# Altium PCB Control_PCB.PcbDoc
Units mm, origin at the board's own origin, x right, y up, seen from the top; angles counter-clockwise.
Board outline 110 x 107.95 mm, 2 copper layers (Top Layer, Bottom Layer); 75 components, 62 nets, 258 pads, 54 vias.
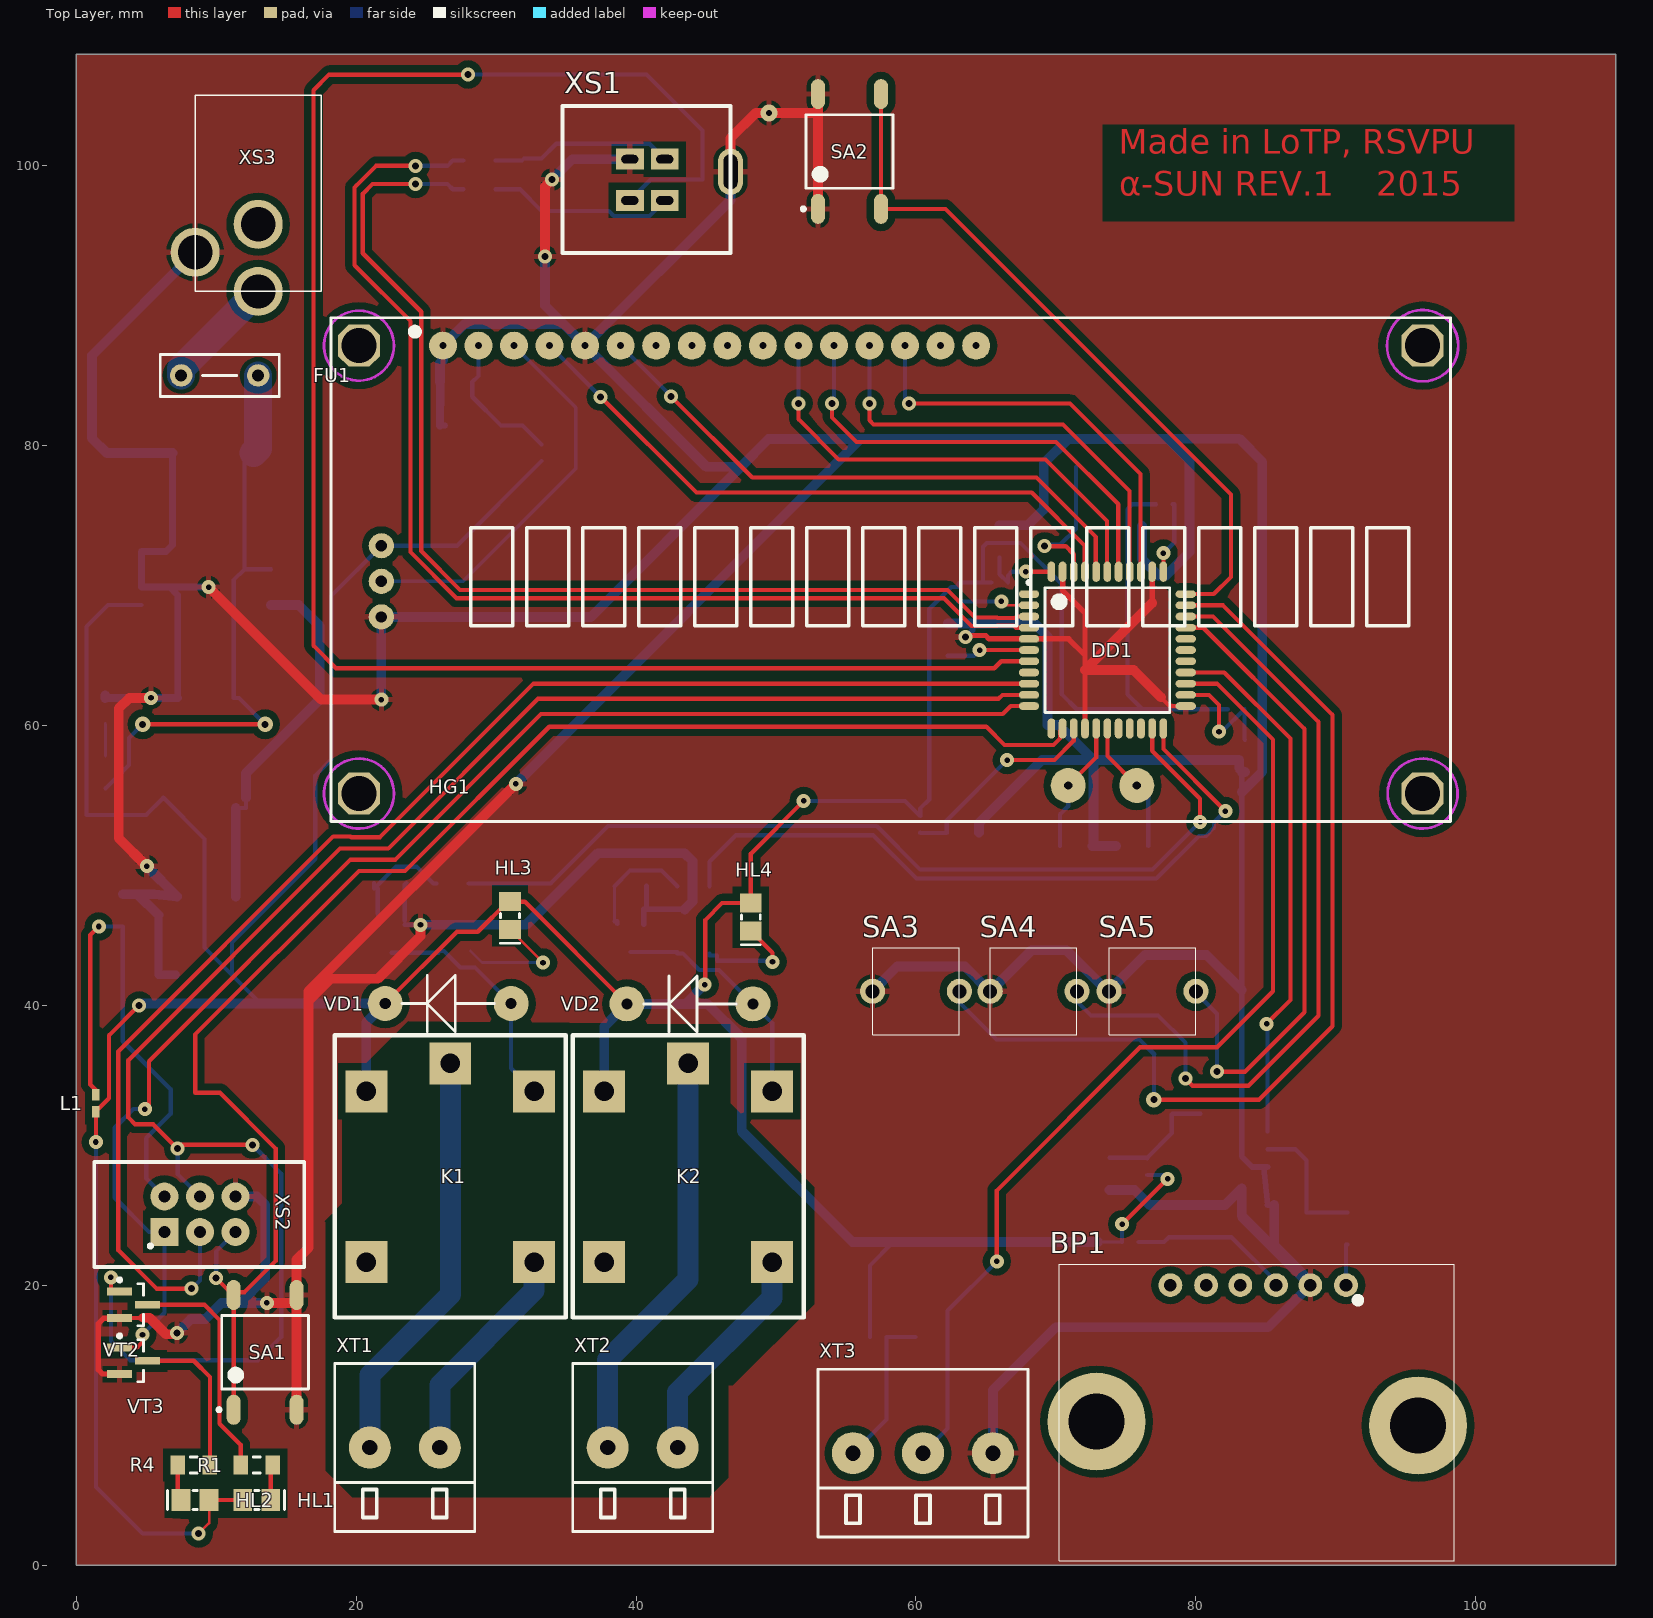
[diagram p0: Top Layer view]
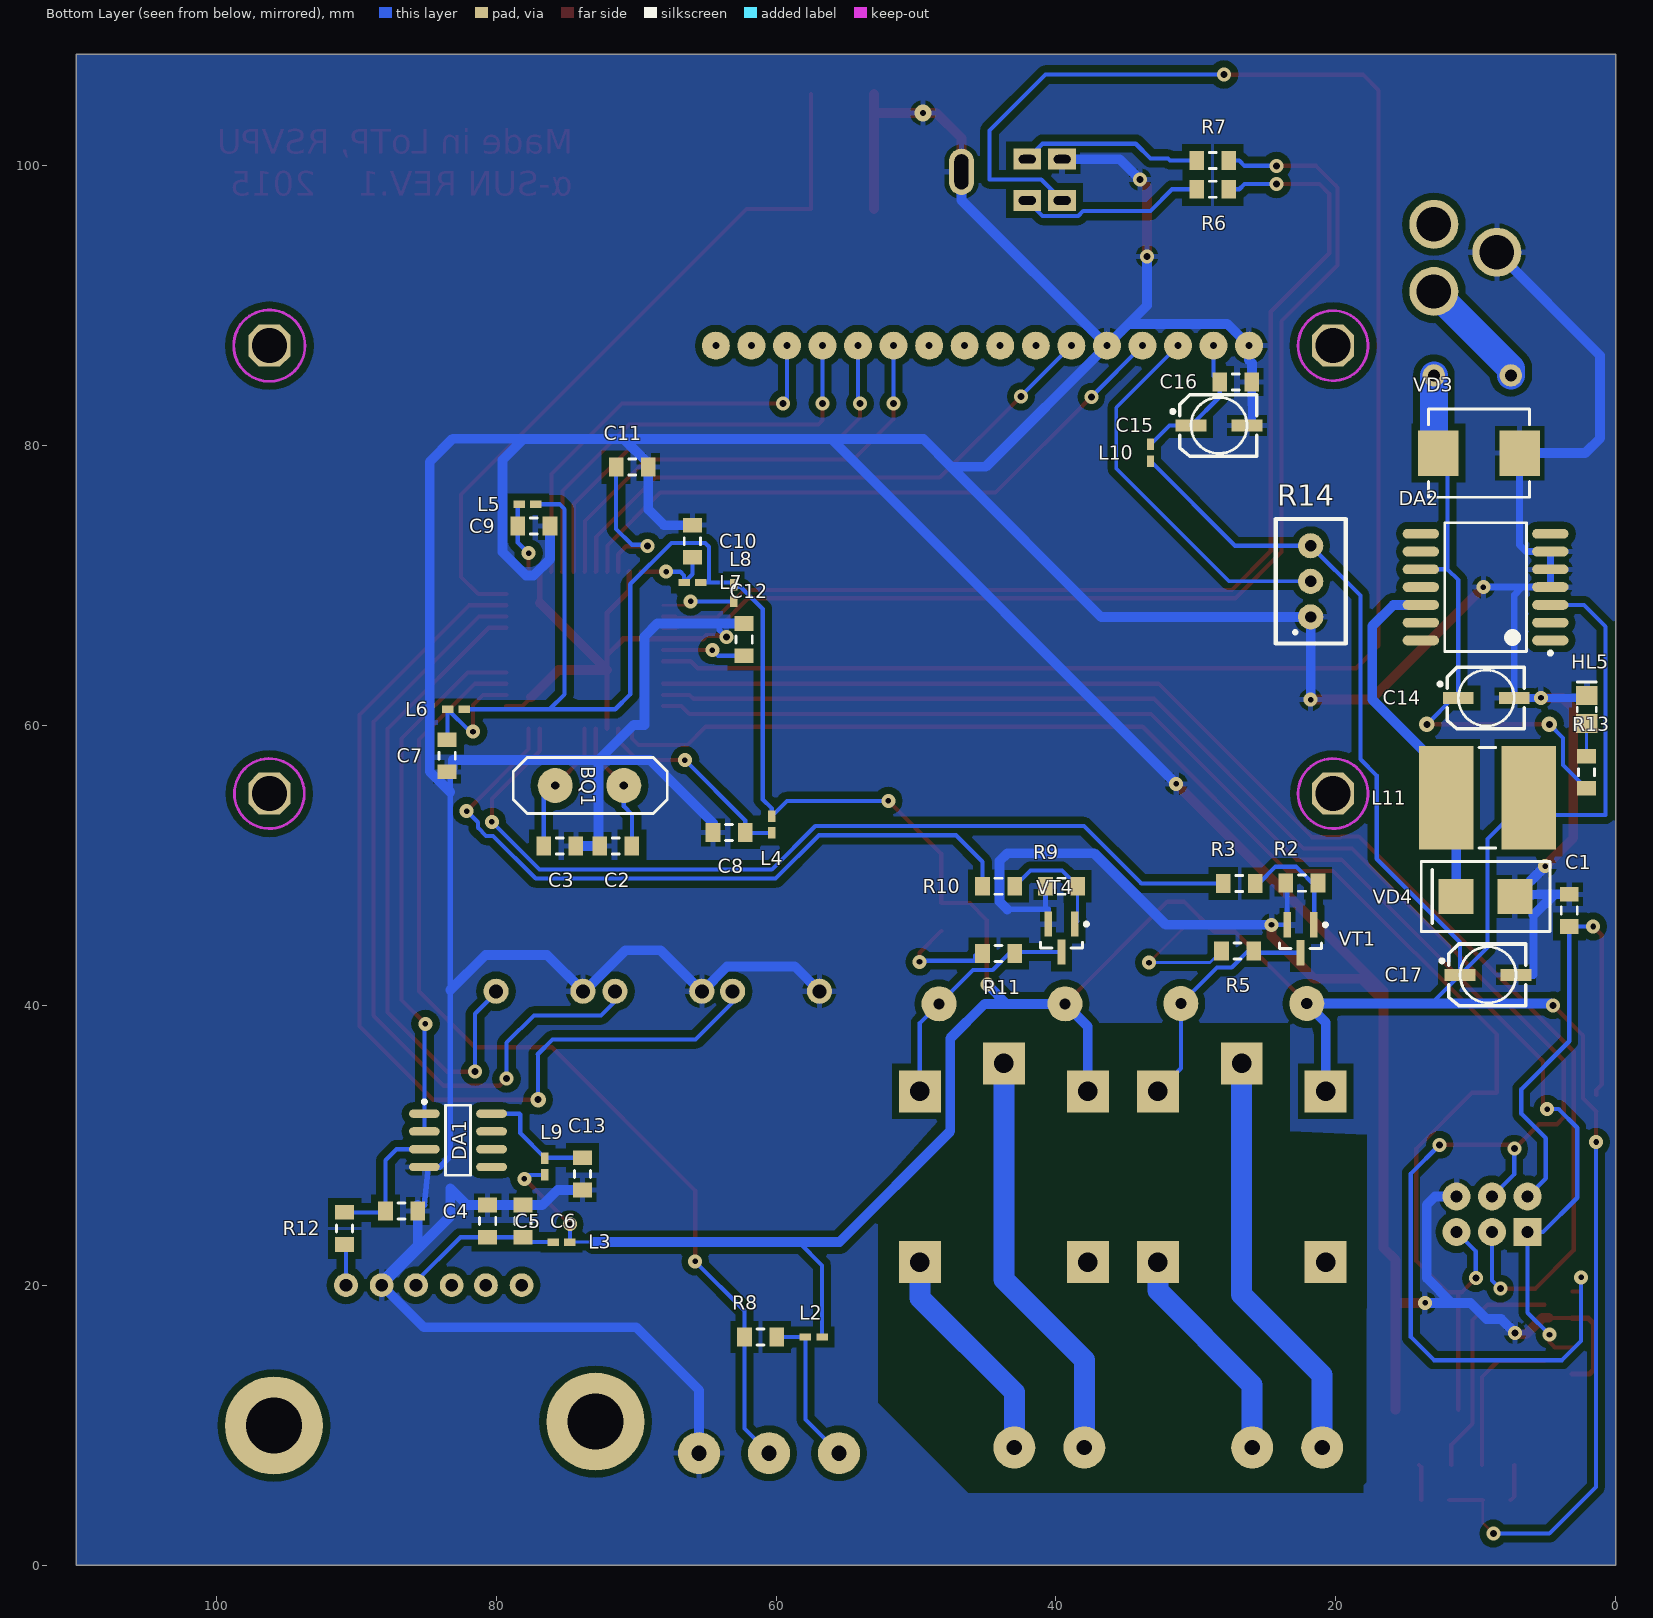
[diagram p1: Bottom Layer view, seen from below]

## Layer stack, top to bottom
Top Solder: solder mask 0.0102, Solder Resist, Dk 3.5
Top Layer: signal copper 0.0356
Dielectric 1: dielectric 0.32, FR-4, Dk 4.8
Bottom Layer: signal copper 0.0356
Bottom Solder: solder mask 0.0102, Solder Resist, Dk 3.5

## Board outline
0,0 110,0 110,107.95 0,107.95

## Design rules (kind name [scope] priority, off if disabled: settings)
Clearance Clearance_poly [InPolygon OR InPoly] p1: gap=0.5
Clearance Clearance_220V_1.5mm [InNet('220V_*')] p2: gap=1.5
Clearance Clearance_USB_0.1mm [InDifferentialPair ('D_USB')] p3: gap=0.2
Clearance Clearance_pad [IsPad] p4: gap=0.2
Clearance Clearance_all [All] p5: gap=0.35
DiffPairsRouting DiffPair_DiffPairsRouting [InDifferentialPair ('D_USB')] p1: maxlimit=1 minlimit=0.3 mostfreqgap=0.3 toplayer_minwidth=0.3 toplayer_maxwidth=0.3 toplayer_prefwidth=0.3 bottomlayer_minwidth=0.3 bottomlayer_maxwidth=0.3 bottomlayer_prefwidth=0.3 maxuncoupledlength=12.7
MatchedLengths DiffPair_MatchedLengths [InDifferentialPair ('D_USB')] p1: tolerance=25.4 checknetsindiffpair=TRUE checkdiffpairvsdiffpair=TRUE checkothers=TRUE
MaximumViaCount [All] p1: limit=10
MinimumSolderMaskSliver [All] p1: minsoldermaskwidth=0
PolygonConnect [All] p1: connectstyle=Relief reliefconductorwidth=0.4 reliefentries=4 polygonreliefangle="90 Angle" airgapwidth=0.3
RoutingPriority RoutingPriority_diffpair [(InDifferentialPairClass('All Differential Pairs'))] p1: routingpriority=0
RoutingPriority RoutingPriority_POWER [(InNet('+5V') OR InNet('GND'))] p2: routingpriority=100
RoutingPriority [All] p3: routingpriority=0
RoutingTopology RoutingTopology_GND [InNet('GND')] p1: topology=Starburst
RoutingTopology [All] p2: topology=Shortest
RoutingVias [All] p1: holewidth=0.4 width=1 viastyle="Through Hole" minholewidth=0.4 minwidth=1 maxholewidth=0.5 maxwidth=1.1
SMDNeckDown [All] p1: percent=70.000
SilkToSolderMaskClearance [IsPad] p1: minsilkscreentomaskgap=0.2 clearancetoexposedcopper=TRUE
SolderMaskExpansion [All] p1: expansion=0.102
ViasUnderSMD [All] p1: allowed=FALSE
Width Width_GND_0.7mm [InNet('GND')] p1: maxlimit=2 minlimit=0.3 preferedwidth=0.7
Width Width_+5V_0.7mm [InNet('+5V')] p2: maxlimit=2 minlimit=0.3 preferedwidth=0.7
Width [All] p3: maxlimit=2 minlimit=0.3 preferedwidth=0.3
24 further rules are at their usual default settings.

## Classes and differential pairs
net class LCD_[4..9]: LCD_4 LCD_5 LCD_6 LCD_7 LCD_8 LCD_9
component class Power_SCH: C7 C8 C9 C10 C11 C12 C13 C14 C15 C16 C17 DA1 DA2 FU1 HL5 L4 L5 L6 L7 L8 L9 L10 L11 R13 R14 VD3 VD4 XS3
component class Control_SCH: BP1 BQ1 C1 C2 C3 C4 C5 C6 DD1 HG1 HL1 HL2 HL3 HL4 K1 K2 L1 L2 L3 R1 R2 R3 R4 R5 R6 R7 R8 R9 R10 R11 R12 SA1 SA2 SA3 SA4 SA5 VD1 VD2 VT1 VT2 VT3 VT4 XS1 XS2 XT1 XT2 XT3
differential pair D_USB: +USB_P -USB_N

## Components (designator, comment, footprint, x,y, rotation, side; value= is the part's Value field where it differs from the comment)
BP1 "MPX5700AP" MPX5700AP 90.725,20 r180 top
BQ1 "16 МГц" HC-49/S 75.775,55.7 r180 bottom
C1 "100n" SMDRC0805 3.325,46.775 r90 bottom
C2 "20p" SMDRC0805 71.45,51.375 r0 bottom
C3 "20p" SMDRC0805 75.45,51.375 r180 bottom
C4 "330n" SMDRC0805 86.75,25.3 r180 bottom
C5 "1u" SMDRC0805 80.6,24.575 r270 bottom
C6 "10n" SMDRC0805 78.075,24.575 r270 bottom
C7 "100n" SMDRC0805 83.5,57.825 r270 bottom
C8 "100n" SMDRC0805 63.35,52.35 r0 bottom
C9 "100n" SMDRC0805 77.303,74.234 r180 bottom
C10 "100n" SMDRC0805 65.975,73.15 r90 bottom
C11 "100n" SMDRC0805 70.275,78.45 r0 bottom
C12 "1u" SMDRC0805 62.275,66.125 r90 bottom
C13 "100n" SMDRC0805 73.825,27.95 r270 bottom
C14 "CA050M2R20REB-0405" CAP_POLAR_ELLYTE_B 9.25,61.95 r180 bottom
C15 "CA016M0010REB-0405" CAP_POLAR_ELLYTE_B 28.35,81.425 r180 bottom
C16 "100n" SMDRC0805 27.15,84.525 r180 bottom
C17 "CA016M0010REB-0405" CAP_POLAR_ELLYTE_B 9.125,42.175 r180 bottom
DA1 "AD8542ARZ" AD8542ARZ 82.725,30.35 r180 bottom
DA2 "LM2574M-5.0" SOIC127P1030X264-14M 9.3,69.875 r0 bottom
DD1 "ATMega32U4-AU" 44ML_L 73.675,65.375 r0 top
FU1 "EFuse LP60-110F" "EFuse 1.1A" 7.5,85 r0 top
HG1 "WH1601A-YYK-CTK#" WH1601A 18.2,53.125 r0 top
HL1 "Orange" DIOMELF2012M 12.9,4.65 r0 top
HL2 "Orange" DIOMELF2012M 8.5,4.65 r180 top
HL3 "Red" DIOMELF2012M 31,46.4 r270 top
HL4 "Red" DIOMELF2012M 48.2,46.3 r270 top
HL5 "Green" DIOMELF2012M 2.075,61.125 r90 bottom
K1 "TRU-5VDC-SB-CL" TRU-5VDC-SB-CL 34.975,37.85 r90 top
K2 "TRU-5VDC-SB-CL" TRU-5VDC-SB-CL 51.975,37.85 r90 top
L1 "MPZ1608S181A" INDC0603X03M 1.4,33 r90 top
L2 "MPZ1608S181A" INDC0603X03M 57.3,16.3 r180 bottom
L3 "MPZ1608S181A" INDC0603X03M 75.325,23.075 r180 bottom
L4 "MPZ1608S181A" INDC0603X03M 60.3,52.925 r90 bottom
L5 "MPZ1608S181A" INDC0603X03M 77.75,75.8 r180 bottom
L6 "MPZ1608S181A" INDC0603X03M 82.875,61.15 r180 bottom
L7 "MPZ1608S181A" INDC0603X03M 65.975,70.2 r180 bottom
L8 "MPZ1608S181A" INDC0603X03M 63.025,69.45 r90 bottom
L9 "MPZ1608S181A" INDC0603X03M 76.525,28.475 r90 bottom
L10 "MPZ1608S181A" INDC0603X03M 33.25,79.475 r270 bottom
L11 "SCD0705T-331K-N" INDP7972X50M 9.175,54.825 r0 bottom
R1 "220" SMDRC0805 12.9,7.15 r0 top
R2 "10k" SMDRC0805 22.425,48.725 r0 bottom
R3 "200" SMDRC0805 26.9,48.7 r180 bottom
R4 "220" SMDRC0805 8.4,7.15 r180 top
R5 "220" SMDRC0805 27.025,43.875 r0 bottom
R6 "22" SMDRC0805 28.8,98.3 r0 bottom
R7 "22" SMDRC0805 28.8,100.35 r0 bottom
R8 "4,7k" SMDRC0805 61.1,16.3 r0 bottom
R9 "10k" SMDRC0805 39.6,48.5 r0 bottom
R10 "200" SMDRC0805 44.1,48.5 r180 bottom
R11 "220" SMDRC0805 44.1,43.7 r0 bottom
R12 "750" SMDRC0805 90.825,24.05 r90 bottom
R13 "750" SMDRC0805 2.1,56.65 r270 bottom
R14 "T93YA102KT20" T93YA 21.8,67.75 r90 bottom
SA1 "DTSM20-4.3" DTSM20 13.5,15.2 r90 top
SA2 "DTSM20-4.3" DTSM20 55.25,101 r90 top
SA3 "SWT14-13" SWT14 56.9,37.9 r0 top
SA4 "SWT14-13" SWT14 65.3,37.9 r0 top
SA5 "SWT14-13" SWT14 73.8,37.9 r0 top
VD1 "1N4001" PinDiode 31.075,40.125 r180 top
VD2 "1N4001" PinDiode 48.35,40.1 r180 top
VD3 "SM15T12CA" SUPRES3216X18N 9.775,79.45 r0 bottom
VD4 "10BQ060TRPBF" "SHOTKY 4.1x3.3" 9.3,47.775 r0 bottom
VT1 "2N7002" "SOT23 (TO-236AB)" 22.525,44.75 r270 bottom
VT2 "2N7002" "SOT23 (TO-236AB)" 4.1,18.6 r0 top
VT3 "2N7002" "SOT23 (TO-236AB)" 4.1,14.6 r0 top
VT4 "2N7002" "SOT23 (TO-236AB)" 39.6,44.8 r270 bottom
XS1 "USB B A-09 РОЗЕТКА НА ПЛАТУ" USB2.0B_Vertical 46.75,104.25 r180 top
XS2 "IDC-06M" IDC-06M 6.3,23.8 r90 top
XS3 "330-031-12" 330-031-12 17.5,105 r180 top
XT1 "305-021-12" 305-021-12 20.975,8.4 r0 top
XT2 "305-021-12" 305-021-12 37.975,8.4 r0 top
XT3 "305-031-12" 305-031-12 55.5,8 r0 top

## Footprints (in the part's own frame and the unit in brackets; to place one, negate y for a bottom-side part, rotate by r counter-clockwise, add the part's x,y. Pads: shape width x height; smd on the part's side, far side on the other; paste and mask are expansions set on the pad)
44ML_L [mm] "Thin QFP, 44-Leads, Body 10x10mm, Pitch 0.8mm, IPC High Density"
  oval 1.45x0.55 smd: 1(-5.6,4) 2(-5.6,3.2) 3(-5.6,2.4) 4(-5.6,1.6) 5(-5.6,0.8) 6(-5.6,0) 7(-5.6,-0.8) 8(-5.6,-1.6) 9(-5.6,-2.4) 10(-5.6,-3.2) 11(-5.6,-4) 23(5.6,-4) 24(5.6,-3.2) 25(5.6,-2.4) 26(5.6,-1.6) 27(5.6,-0.8) 28(5.6,0) 29(5.6,0.8) 30(5.6,1.6) 31(5.6,2.4) 32(5.6,3.2) 33(5.6,4)
  oval 0.55x1.45 smd: 12(-4,-5.6) 13(-3.2,-5.6) 14(-2.4,-5.6) 15(-1.6,-5.6) 16(-0.8,-5.6) 17(0,-5.6) 18(0.8,-5.6) 19(1.6,-5.6) 20(2.4,-5.6) 21(3.2,-5.6) 22(4,-5.6) 34(4,5.6) 35(3.2,5.6) 36(2.4,5.6) 37(1.6,5.6) 38(0.8,5.6) 39(0,5.6) 40(-0.8,5.6) 41(-1.6,5.6) 42(-2.4,5.6) 43(-3.2,5.6) 44(-4,5.6)
  silkscreen extent -5.72,-4.45 4.45,4.95, body extent -5,-5 5,5, height 1.2
305-021-12 [mm]
  round 3 hole 1.1: 1(0,0) 2(5,0)
  silkscreen extent -2.5,-6 7.5,6, body extent -2.5,-6.5 7.5,6, height 12.5
305-031-12 [mm]
  round 3 hole 1.1: 1(0,0) 2(5,0) 3(10,0)
  silkscreen extent -2.5,-6 12.5,6, body extent -2.5,-6.5 12.5,6, height 12.5
330-031-12 [mm] "Power_Con"
  round 3.5 hole 2.45: 1(4.5,14) 2(9,11.2) 3(4.5,9.2)
  silkscreen extent 0,0 9,14, body extent -0.5,-0.1 9.48,14, height 10.96
AD8542ARZ [mm] "SOIC, 8-Leads, Body 4,90x3,90mm"
  oval 2.2x0.6 smd: 1(-2.4,1.905) 2(-2.4,0.635) 3(-2.4,-0.635) 4(-2.4,-1.905) 5(2.4,-1.905) 6(2.4,-0.635) 7(2.4,0.635) 8(2.4,1.905)
  silkscreen extent -2.53,-2.5 0.9,2.88, body extent -2,-2.5 2,2.5, height 1.75
CAP_POLAR_ELLYTE_B [mm] "Surface Mount Aluminum Electrolytic (size code B)"
  rect 2.2x0.85 smd: 1(2,0) 2(-2,0)
  silkscreen extent -3.43,-2.2 2.7,2.2, body extent -2.7,-2.2 2.8,2.2, height 5.5
DIOMELF2012M [mm] "MELF Diode, 2-Leads, Body 2,00x1,20mm, IPC Low Density"
  rect 1.35x1.55 smd: 1(-1,0) 2(1,0)
  silkscreen extent -0.15,-0.68 1.98,0.67, body extent -1,-0.6 1,0.6, height 1.2
DTSM20 [mm] "DTSM20 button footprint"
  oval 2.15x1 smd: 1(-4.1,2.25) 1(4.1,2.25) 2(-4.1,-2.25) 2(4.1,-2.25)
  silkscreen extent -4.22,-3.1 2.62,3.42, body extent -3.1,-3.1 3.1,3.1, height 5.5
"EFuse 1.1A" [mm]
  round 1.6 hole 0.85: 1(0,0) 2(5.5,0)
  silkscreen extent -1.5,-1.5 7,1.5, body extent -3.23,-0.5 8.73,0.5, height 12.99
HC-49/S [mm]
  round 2.5 hole 0.6: 1(0,0) 2(4.9,0)
  silkscreen extent -3,-2 8,2, body extent -3.5,-2.5 8.5,2.5, height 3.5
IDC-06M [mm]
  rect 2x2 hole 0.85: 1(0,0)
  round 2 hole 0.85: 2(2.54,0) 3(0,-2.54) 4(2.54,-2.54) 5(0,-5.08) 6(2.54,-5.08)
  silkscreen extent -2.5,-10 5,5, body extent -2.5,-10 5,5, height 8.4
INDC0603X03M [mm] "Chip Inductor, 2-Leads, Body 0,60x0,30mm, IPC Low Density"
  rect 0.82x0.52 smd: 1(-0.595,0) 2(0.595,0)
  body extent -0.3,-0.15 0.3,0.15, height 0.3
INDP7972X50M [mm] "Precision Wire Wound Inductor, 2-Leads, Body 7,90x7,20mm, IPC Low Density"
  rect 3.9x7.4 smd: 1(-2.95,0) 2(2.95,0)
  silkscreen extent -0.6,-3.6 0.6,3.6, body extent -3.95,-3.6 3.95,3.6, height 5
MPX5700AP [mm]
  round 7 hole 4: 0(-5.15,10.025) 0(17.825,9.75)
  round 1.7 hole 0.9: 1(0,0) 2(2.55,0) 3(5,0) 4(7.55,0) 5(10,0) 6(12.55,0)
  silkscreen extent -7.75,-1.5 20.5,19.68, body extent -2.48,-0.04 14.48,27, height 8
PinDiode [mm] "Simple pin diode with A and K designators"
  round 2.5 hole 0.8: A(0,0) K(9,0)
  silkscreen extent 1.2,-2 7.8,2, body extent -0.4,-1.4 9.4,1.4, height 2.79
"SHOTKY 4.1x3.3" [mm]
  rect 2.5x2.5 smd: A(-2.1,0) K(2.1,0)
  silkscreen extent -4.6,-2.5 4.6,2.5
SMDRC0805 [mm] "Chip Resistor, 2-Leads, Body 2,00x1,20mm, IPC Low Density"
  rect 1.05x1.35 smd: 1(-1.15,0) 2(1.15,0)
  silkscreen extent -0.25,-0.57 0.25,0.57, body extent -1,-0.6 1,0.6, height 0.4
SOIC127P1030X264-14M [mm] "SOIC, 14-Leads, Body 8,99x7,49mm, Pitch 1,27mm, IPC Low Density"
  oval 2.6x0.7 smd: 1(-4.625,3.81) 2(-4.625,2.54) 3(-4.625,1.27) 4(-4.625,0) 5(-4.625,-1.27) 6(-4.625,-2.54) 7(-4.625,-3.81) 8(4.625,-3.81) 9(4.625,-2.54) 10(4.625,-1.27) 11(4.625,0) 12(4.625,1.27) 13(4.625,2.54) 14(4.625,3.81)
  silkscreen extent -4.75,-4.6 2.93,4.83, body extent -3.8,-4.6 3.8,4.6, height 2.65
"SOT23 (TO-236AB)" [mm] "SOT23, 3-Leads, Body 2,90x2,45mm, Pitch 0,95mm, IPC Low Density"
  rect 1.8x0.55 smd: 1(-1,0.95) 2(-1,-0.95) 3(1,0)
  silkscreen extent -1.12,-1.5 0.7,1.9, body extent -0.7,-1.5 0.7,1.5, height 1.1
SUPRES3216X18N [mm]
  rect 2.9x3.25 smd: 1(-2.9,0) 2(2.9,0)
  silkscreen extent -3.6,-3.15 3.6,3.15, body extent -3.57,-3.13 3.57,3.13, height 2.65
SWT14 [mm]
  round 1.8 hole 1: 1(0,3.1) 2(6.2,3.1)
  silkscreen extent 0,0 6.2,6.2, body extent 0,0 6.2,6.2, height 16.5
T93YA [mm] "3/8\" Square Multi-Turn Cermet Trimmer"
  round 1.8 hole 0.8: 1(0,0) 2(2.54,0) 3(5.08,0)
  silkscreen extent -1.9,-2.5 7,2.5, body extent -1.9,-2.4 7,2.4, height 11.2
TRU-5VDC-SB-CL [mm]
  rect 3x3 hole 1.4: 1(-4,14.25) 2(-4,2.25) 3(-2,8.25) 4(-16.2,14.25) 5(-16.2,2.25)
  silkscreen extent -20.15,0 0,16.5, body extent -20.23,-0.01 0.15,16.62, height 21.2
USB2.0B_Vertical [mm] "Connector; USB1.1, Type B, Thru-Hole; 4 Position; Right Angle"
  rect 2x1.5 hole 0.6 slot 1.2 at 0 deg: D+(4.7,3.8) D-(4.7,6.75) GND(7.2,3.8) VCC(7.2,6.75)
  oval 1.8x3.3 hole 1 slot 2.5 at 90 deg: SHLD(0,4.7)
  silkscreen extent 0,0 12,10.5, body extent 0,0 12,10.5, height 16
WH1601A [mm]
  oct 3x3 hole 2.5: 0(2,2) 0(2,34) 0(78,2) 0(78,34)
  round 2 hole 0.5: 1(8,34) 2(10.54,34) 3(13.08,34) 4(15.62,34) 5(18.16,34) 6(20.7,34) 7(23.24,34) 8(25.78,34) 9(28.32,34) 10(30.86,34) 11(33.4,34) 12(35.94,34) 13(38.48,34) 14(41.02,34) 15(43.56,34) 16(46.1,34)
  Keep-Out Layer circle w0.2: c78,2 r2.5
  Keep-Out Layer circle w0.2: c78,34 r2.55
  Keep-Out Layer circle w0.2: c2,34 r2.5
  Keep-Out Layer circle w0.2: c2,2 r2.5
  silkscreen extent 0,0 80,36, body extent 0,0 80,36, height 12

## Part data
BP1: "Pressure sensor, 700kPa"
BQ1: library part Piezoelectric_16000, "Piezoelectric elements"
C1 C7 C8 C9 C10 C11 C13 C16: library part "Capacitor 0805 100n", "Generic capasitor non-polar"
C2 C3: library part "Capacitor 0805 20p", "Generic capasitor non-polar"
C4: library part "Capacitor 0805 330n", "Generic capasitor non-polar"
C5 C12: library part "Capacitor 0805 1u", "Generic capasitor non-polar"
C6: library part "Capacitor 0805 10n", "Generic capasitor non-polar"
C14: library part 02200_050, "2,2uF 50V Polar capacitor"
C15 C17: library part 10000_016, "10uF 16V Polar SMD cap"
DD1: library part ATMega32U4
FU1: "Fuse"
HG1: library part "LCD 1601A", "Liquid crystal display"
HL1 HL2: library part LED1_O, "Diod LED SMD Orange"
HL3 HL4: library part LED1_R, "Diod LED SMD Red"
HL5: library part LED1_G, "Diod LED SMD Green"
L1 L2 L3 L4 L5 L6 L7 L8 L9 L10: library part "Ferrite Bead", "Ferrite Bead"
L11: "Inductor"
R1 R4 R5 R11: library part "Resistor 0805 220", "Generic resistor"
R2 R9: library part "Resistor 0805 10k", "Generic resistor"
R3 R10: library part "Resistor 0805 200", "Generic resistor"
R6 R7: library part "Resistor 0805 22", "Generic resistor"
R8: library part "Resistor 0805 4,7k", "Generic resistor"
R12 R13: library part "Resistor 0805 750", "Generic resistor"
R14: library part "Res trim_1k", "Resistor trimming"
SA1 SA2: library part Switch1_DTSM20-4.3, "Switch open"
SA3 SA4 SA5: library part SWT-14-13
VD1 VD2: "Rectifying diode"
VD3: "Diod suppressor"
VD4: "DIODE SCHOTTKY 60V 1A DO214AA"
VT1 VT2 VT3 VT4: library part "2N7002 n-MOSFET", "60V, 300mA N-channel Trench MOSFET"
XS1: library part USB2.0-BR, "USB-B Vertical"
XS2: library part "Con6_M IDC-06M_SPI", "SPI connector"
XT1 XT2: library part "Con2_D 305-021-12", "Demountable connection  2-pin"
XT3: library part "Con3_D 305-031-12", "Demountable connection 3-pin"

## Via types
v1: diameter 1, hole 0.4, Top Layer to Bottom Layer, 28 vias
v2: diameter 1, hole 0.5, Top Layer to Bottom Layer, 22 vias
v3: diameter 1.1, hole 0.5, Top Layer to Bottom Layer, 3 vias
v4: diameter 1.2, hole 0.4, Top Layer to Bottom Layer, 1 vias

## Nets (pads, with @x,y where several pads share a name; then routed paths per layer and width w, separated by ;. In a path a pad name is that pad's centre, name@x,y a point inside that pad or via, vN(x,y) a via of type N, cw(c..) or ccw(c..) an arc to the next point about the centre after c; other vN are vias at no path point)
220V_N.C1: K1.4
220V_N.C2: K2.4
220V_N.O1: K1.3 XT1.1 | length 29.8
  Bottom Layer w1.5: XT1.1 20.975,13.6 26.725,19.35 K1.3
220V_N.O2: K2.3 XT2.1 | length 29.8
  Bottom Layer w1.5: XT2.1 37.975,14.65 43.725,20.4 K2.3
220V_ZERO1: K1.5 XT1.2 | length 16
  Bottom Layer w1.5: XT1.2 25.975,12.875 32.725,19.625 K1.5
220V_ZERO2: K2.5 XT2.2 | length 16
  Bottom Layer w1.5: XT2.2 42.975,12.35 49.725,19.1 K2.5
+5V: C17.2 DA2.3 HL1.1 HL2.1 HL3.1 HL4.1 K1.1 K2.1 L1.1 L2.2 L3.2 L4.2 L5.2 L6.2 L7.2 L8.2 L9.1 L10.2 L11.1 R14.3 VD1.K VD2.K | length 350.9
  Top Layer w0.2: v2(8.75,2.25) 9.5,3 HL2.1
  Top Layer w0.3: v1(1.41,30.227) 1.41,32.395 L1.1 2.35,33.355 2.35,37.85 v2(4.5,40) ; HL2.1 HL1.1 ; VD1.K 27.2,45.25 28.693,45.25 30.843,47.4 HL3.1 32.05,47.4 VD2.K ; v1@44.95,41.675 44.95,46.1 46.15,47.3 HL4.1 48.2,50.825 v1(51.975,54.6) ; v1(74.73,24.355) v1(77.975,27.6)
  Bottom Layer w0.2: 73,23.075 L3.2
  Bottom Layer w0.21: L8.2 63.025,70.2 L8.2@63.18,70.2
  Bottom Layer w0.3: v1(1.41,30.227) 1.41,5.59 4.75,2.25 v2(8.75,2.25) ; DA2.3 2.28,68.605 0.725,67.05 0.725,53.6 5,53.6 L11.1 9.175,51.875 9.175,44.125 C17.2 ; 13.175,40.125 C17.2 ; L10.2 27.2,72.83 R14.3 18.25,69.28 18.25,57.58 17.085,56.415 17.085,50.465 11.125,44.505 C17.2 ; v1(51.975,54.6) 59.22,54.6 L4.2 60.3,54.063 60.947,54.71 60.947,68.312 62.522,69.887 63.025,69.887 L8.2 ; L2.2 56.705,21.405 58.375,23.075 ; L8.2@63.18,70.2 64.783,70.2 ; L7.2 64.783,70.2 ; L3.2 v1(74.73,24.355) ; L9.1 77.695,27.88 v1(77.975,27.6) ; L5.2 75.476,75.8 75.12,75.444 75.12,62.216 76.186,61.15 ; L6.2 76.186,61.15 ; 64.783,70.2 64.783,72.757 65.062,73.036 67.464,73.036 70.421,70.079 70.421,62.216 71.487,61.15 76.186,61.15
  Bottom Layer w0.7: v2(4.5,40) 4.625,40.125 13.175,40.125 VD1.K 20.725,38.775 K1.1 ; K2.1 37.725,38.475 VD2.K 43.525,40.1 ; v1(44.9,41.475) 43.525,40.1 ; 73,23.075 58.375,23.075 55.475,23.075 47.55,31 47.55,37.641 45.091,40.1 43.525,40.1
GND: BP1.2 C1.2 C2.2 C3.2 C4.2 C5.1 C6.1 C7.2 C8.2 C9.2 C10.2 C11.1 C12.2 C13.2 C14.1 C15.1 C16.2 C17.1 DA1.4 DA2.4 DA2.5 DA2.6 DD1.5 DD1.15 DD1.23 DD1.35 DD1.43 HG1.1 HG1.5 HL5.2 R2.2 R9.2 R14.1 SA1.2 SA2.1 SA3.1 SA4.1 SA5.1 VD3.1 VD4.A VT1.2 VT2.2 VT3.2 VT4.2 XS1.GND XS1.SHLD XS2.6 XS3.2 XT3.3 | length 694.4
  Top Layer w0.3: VT2.2 4.8,17.65 ; 77.5,62 78.125,61.375 DD1.23
  Top Layer w0.385: VT3.2 1.893,13.65 1.587,13.956 1.587,17.258 1.979,17.65 VT2.2 ; v2(63.553,66.303) 63.667,66.417 64.986,66.417 65.228,66.175 DD1.5 69.224,66.175 69.227,66.178 69.405,66.178 70.904,66.178 72.075,65.007 ; DD1.43 70.475,69.633 72.075,68.033 72.075,65.007 ; DD1.15 72.075,63.944 72.075,65.007 ; 76.875,68.744 DD1.35
  Top Layer w0.7: 4.8,17.671 5.234,17.671 6.4,16.505 6.4,16.5 7.1,16.5 v2(7.2,16.6) ; v1(5.042,49.933) 3.035,51.94 3.035,61.2 3.797,61.962 v1(5.347,61.962) ; v1(9.461,69.875) 17.501,61.835 v1(21.8,61.835) ; v1(13.627,18.731) SA1.2@15.75,18.731 ; SA1.2@15.75,11.1 SA1.2@15.75,18.731 ; v1(24.6,45.75) 24.6,44.944 21.552,41.896 18.174,41.896 16.6,40.322 16.6,23.148 16.599,23.147 ; v1(31.407,55.815) 16.599,41.007 16.599,23.147 ; v2(33.5,93.5) 33.5,98.5 v2(34,99) ; XS1.SHLD 46.75,101.948 48.552,103.75 v4(49.5,103.75) 53,103.75 ; SA2.1@53,96.9 53,103.75 ; SA2.1@53,105.1 53,103.75 ; 76.875,68.744 72.075,63.944 75.556,63.944 77.5,62 ; SA1.2@15.75,18.731 15.75,19.3 15.75,21.819 16.599,22.668 16.599,23.147
  Bottom Layer w0.3: VT1.2 v1(24.6,45.75) ; VT1.2@23.475,46.036 23.475,48.625 R2.2
  Bottom Layer w0.385: VT4.2 40.55,46.849 40.75,46.849 ; R9.2 40.75,46.849 ; 43.472,46.849 40.75,46.849 ; v2(63.553,66.303) 64.05,66.8 64.05,67.275
  Bottom Layer w0.416: C15.1@25.997,81.425 C15.1
  Bottom Layer w0.42: C7.2@83.274,56.675 83.274,55.231 83.274,41.083 83.274,29.196 84.025,28.445 DA1.4 ; DA1.4@84.852,28.417 85.128,25.725 C4.2@85.6,25.725
  Bottom Layer w0.49: DA2.5 DA2.5@4.661,71.145 ; VD3.1 6.875,72.884 6.406,72.415 DA2.6 4.661,72.415 DA2.5@4.661,71.145 ; C14.1@7.252,61.95 7.252,69.328 6.705,69.875 ; v1(9.461,69.875) 6.705,69.875 ; 69.405,66.178 69.405,66.356 ; DA2.5@4.661,71.145 4.661,69.875 DA2.4 6.705,69.875
  Bottom Layer w0.595: HL5.2@2.075,61.95 v1@5.359,61.95 ; v1(5.347,61.962) v1@5.359,61.95 ; 5.88,46.443 5.88,42.175 C17.1 ; C14.1@7.252,61.95 C14.1 v1@5.359,61.95 ; C15.1@25.997,81.425 25.997,82.892 26,82.895 C16.2
  Bottom Layer w0.7: HL5.2@2.075,61.95 HL5.2 ; C1.2 4.398,47.925 ; v1(5.042,49.933) VD4.A 5.578,47.925 4.398,47.925 ; 5.88,46.443 4.398,47.925 ; VD3.1 2.184,79.45 1.13,80.504 1.13,86.43 XS3.2 ; v2(7.2,16.6) 8.188,17.588 9.233,17.588 10.376,18.731 11.731,18.731 ; XS2.6 12.91,26.34 13.5,25.75 13.5,20.5 11.731,18.731 ; v1(13.627,18.731) 11.731,18.731 ; v1(21.8,61.835) R14.1 36.766,67.75 47.488,78.472 ; v1(24.6,45.75) 32.152,45.75 37.264,50.862 43.472,50.862 44.031,50.303 44.031,47.408 43.472,46.849 ; C16.2 26,85.889 26.2,86.089 HG1.1 27.758,88.683 34.802,88.683 ; v1(31.407,55.815) 56.045,80.453 ; v2(33.5,93.5) 33.5,89.985 34.802,88.683 ; v2(34,99) 35.45,100.45 XS1.GND ; XS1.SHLD 46.75,97.515 HG1.5 ; SA3.1@56.862,40.964 58.658,42.76 63.501,42.76 65.297,40.964 68.261,43.928 70.768,43.928 73.732,40.964 76.368,43.6 80.757,43.6 83.274,41.083 ; C12.2 64.05,67.275 68.487,67.275 69.405,66.356 ; C8.2 64.5,53.021 68.996,57.517 72.682,57.517 ; XT3.3 65.5,12.5 70,17 85.175,17 BP1.2 ; C10.2 68.002,74.3 69.126,75.424 69.126,78.701 70.879,80.453 ; 69.405,66.178 69.405,60.032 70.167,60.032 72.682,57.517 ; C13.2 75.62,26.8 76.695,25.725 C6.1 C5.1 82.08,25.725 83.274,26.919 83.274,24.926 BP1.2@88.062,20.137 ; C3.2 74.3,51.37 72.6,51.37 C2.2 72.682,51.375 72.682,57.517 ; C9.2 76.153,71.868 77.321,70.7 77.864,70.7 79.54,72.376 79.54,78.955 78.041,80.453 ; 83.274,55.231 84.747,56.704 84.747,78.828 83.096,80.479 78.016,80.479 78.041,80.453 ; C7.2@83.274,56.675 C7.2@83.35,56.675 ; C7.2 C7.2@83.35,56.675 ; C4.2@85.6,25.725 C4.2 85.6,22.825 88.175,20.25 BP1.2@88.062,20.137 ; BP1.2@88.2,20 BP1.2@88.062,20.137 ; 34.802,88.683 HG1.5 ; HG1.5 45.013,78.472 47.488,78.472 ; 47.488,78.472 49.47,80.453 56.045,80.453 ; 56.045,80.453 70.879,80.453 ; 70.879,80.453 78.041,80.453 ; 72.682,57.517 83.096,57.517 83.096,56.929 C7.2@83.35,56.675
LCD_4: DD1.39 HG1.11 | length 33.9
  Top Layer w0.3: v2(51.6,83) 51.6,81.875 54.475,79 69.25,79 73.65,74.6 73.65,71 DD1.39
  Bottom Layer w0.3: v2(51.6,83) HG1.11
LCD_5: DD1.38 HG1.12 | length 33
  Top Layer w0.3: v2(54,83) 54,82 55.75,80.25 70,80.25 74.45,75.8 74.45,71 DD1.38
  Bottom Layer w0.3: v2(54,83) 54.14,83.14 HG1.12
LCD_6: DD1.37 HG1.13 | length 31.8
  Top Layer w0.3: v2(56.68,83) 56.68,81.795 56.975,81.5 70.5,81.5 75.25,76.75 75.25,71 DD1.37
  Bottom Layer w0.3: v2(56.68,83) HG1.13
LCD_7: DD1.36 HG1.14 | length 29.9
  Top Layer w0.3: v2(59.5,83) 71,83 76.05,77.95 76.05,71 DD1.36
  Bottom Layer w0.3: HG1.14 59.22,83.28 v2(59.5,83)
LCD_8: DD1.41 HG1.4 | length 46
  Top Layer w0.3: v2(37.472,83.472) 44.32,76.625 68.275,76.625 72.05,72.85 72.05,71 DD1.41
  Bottom Layer w0.3: HG1.4 v2(37.472,83.472)
LCD_9: DD1.40 HG1.6 | length 42.1
  Top Layer w0.3: v2(42.5,83.5) 48.3,77.7 68.6,77.7 72.85,73.45 72.85,71 DD1.40
  Bottom Layer w0.3: HG1.6 42.5,83.525 v2(42.5,83.5)
MISO: DD1.11 VT3.1 XS2.1 | length 99.5
  Top Layer w0.3: VT3.1 4.356,15.55 4.737,15.931 v1(4.737,16.471) ; v1(4.9,32.582) 5.2,32.882 5.2,36 19.6,50.4 22.8,50.4 33.2,60.8 66.2,60.8 66.775,61.375 DD1.11
  Bottom Layer w0.3: v1(4.737,16.471) 6.3,18.034 XS2.1 5.2,23.8 2.75,26.25 2.75,31.25 4.082,32.582 v1(4.9,32.582)
MOSI: DD1.10 VT2.1 XS2.4 | length 127.9
  Top Layer w0.3: v1(2.476,20.56) 2.476,19.55 VT2.1 ; XS2.4 XS2.4@8.84,26.86 ; v2(12.58,30.031) 7.531,30.031 v2(7.25,29.75) 5.5,31.5 4.2,31.5 3.725,31.975 3.725,36.072 18.853,51.2 22.3,51.2 33,61.9 65.9,61.9 66.175,62.175 DD1.10
  Bottom Layer w0.3: v1(2.476,20.56) 2.476,16.013 3.848,14.642 12.992,14.642 14.643,16.293 14.643,27.968 v2(12.58,30.031) ; v2(7.25,29.75) 7.25,27.93 XS2.4
NetBP1_1: BP1.1 R12.1 | length 5.9
  Bottom Layer w0.3: R12.1 R12.1@90.725,22.9 ; R12.1@90.725,22.9 BP1.1 R12.1@90.725,22.9
NetBP1_3: BP1.3 C5.2 C6.2 L3.1 | length 11.8
  Bottom Layer w0.3: L3.1 77.725,23.075 C6.2 C5.2 82.55,23.425 BP1.3@85.862,20.113 ; BP1.3@85.75,20 BP1.3@85.75,20.113 ; BP1.3@85.75,20.113 BP1.3@85.862,20.113 ; BP1.3@85.75,20.113 BP1.3@85.862,20.113
NetBQ1_1: BQ1.1 C3.1 DD1.17 | length 10.1
  Top Layer w0.3: DD1.17 73.675,57.8 BQ1.1
  Bottom Layer w0.3: BQ1.1 75.775,55.714 76.6,55.714 C3.1
NetBQ1_2: BQ1.2 C2.1 DD1.16 | length 9.5
  Top Layer w0.3: BQ1.2 72.875,57.7 DD1.16
  Bottom Layer w0.3: C2.1 70.3,53.64 70.875,54.215 BQ1.2
NetC1_1: C1.1 L1.2 XS2.2 | length 36.1
  Top Layer w0.3: L1.2 1.4,33.945 1,34.345 1,45.012 v1(1.613,45.625)
  Bottom Layer w0.3: v1(1.613,45.625) C1.1 3.325,37.425 6.75,34 6.75,32.25 5,30.5 5,27.64 XS2.2
NetC4_1: C4.1 DA1.3 R12.2 | length 12.7
  Bottom Layer w0.3: DA1.3 87.11,29.715 87.9,28.925 C4.1 C4.1@87.9,25.2 ; C4.1@87.9,25.2 R12.2 C4.1@87.9,25.2
NetC7_1: C7.1 DD1.24 L6.1 | length 9.2
  Top Layer w0.3: DD1.24 80.925,62.175 81.65,61.45 v1(81.65,59.55)
  Bottom Layer w0.2: L6.1@83.47,61.034 L6.1
  Bottom Layer w0.3: v1(81.65,59.55) 81.87,59.55 L6.1 ; L6.1@83.47,61.034 83.47,59.005 C7.1
NetC8_1: C8.1 DD1.14 L4.1 | length 17
  Top Layer w0.3: v1(66.51,57.517) 69.888,57.517 71.275,58.904 DD1.14
  Bottom Layer w0.3: L4.1 L4.1@60.3,52.31 ; v1(66.51,57.517) 62.2,53.207 C8.1 C8.1@62.2,52.31 ; L4.1@60.3,52.31 C8.1@62.2,52.31 ; L4.1@60.3,52.31 C8.1@62.2,52.31
NetC9_1: C9.1 DD1.34 L5.1 | length 6.8
  Top Layer w0.3: DD1.34 v1(77.675,72.295)
  Bottom Layer w0.3: v1(77.675,72.295) 78.453,73.073 C9.1 ; L5.1 L5.1@78.453,75.8 ; C9.1 L5.1@78.453,75.8 ; C9.1 L5.1@78.453,75.8
NetC10_1: C10.1 DD1.44 L7.1 | length 5.7
  Top Layer w0.3: v1(67.856,70.979) 69.675,70.979 DD1.44
  Bottom Layer w0.3: C10.1 65.975,70.795 L7.1 ; L7.1@66.57,70.316 66.57,70.709 66.84,70.979 v1(67.856,70.979)
NetC11_2: C11.2 DD1.42 | length 10.7
  Top Layer w0.3: v2(69.2,72.8) 70.7,72.8 71.275,72.225 DD1.42
  Bottom Layer w0.3: v2(69.2,72.8) 69.4,72.8 69.5,72.9 70.3,72.9 71.425,74.025 C11.2
NetC12_1: C12.1 DD1.6 | length 6
  Top Layer w0.3: v1(64.554,65.375) DD1.6
  Bottom Layer w0.3: C12.1 64.154,64.975 v1(64.554,65.375)
NetC13_1: C13.1 DA1.8 L9.2 | length 11.2
  Bottom Layer w0.3: C13.1 L9.2@76.495,29.1 ; L9.2 L9.2@76.525,29.1 ; DA1.8 78.33,32.255 78.275,32.2 78.275,30.88 ; L9.2@76.495,29.1 L9.2@76.525,29.1 ; L9.2@76.495,29.1 78.275,30.88 ; L9.2@76.495,29.1 78.275,30.88 ; L9.2@76.495,29.1 L9.2@76.525,29.1
NetC14_2: C14.2 DA2.10 FU1.2 R13.2 VD3.2 | length 43.5
  Top Layer w0.3: v3(4.75,60.075) v3(13.5,60.075)
  Bottom Layer w0.21: VD3.2@12.675,79.85 VD3.2@12.687,79.85
  Bottom Layer w0.3: R13.2 3.775,57.175 3.775,59.1 v3(4.75,60.075) ; VD3.2@12.675,79.85 VD3.2 12.02,78.795 12.02,71.145 ; v3(13.5,60.075) 11.625,61.95 C14.2 11.25,70.375 12.02,71.145 ; DA2.10 12.02,71.145
  Bottom Layer w2: VD3.2 13,79.775 FU1.2
NetC15_2: C15.2 C16.1 HG1.2 L10.1 | length 10.2
  Bottom Layer w0.3: HG1.2 28.74,84.965 C16.1 28.3,83.475 C15.2 31.895,81.425 L10.1
NetDA2_12: DA2.12 L11.2 VD4.K | length 26.3
  Bottom Layer w0.3: L11.2@11.4,54.1 12.125,54.1 L11.2
  Bottom Layer w0.7: VD4.K L11.2@11.4,54.1 ; L11.2 12.125,56.575 17.4,61.85 17.4,67.1 15.895,68.605 DA2.12
NetDD1_2: DD1.2 L8.1 | length 5.2
  Top Layer w0.2: v1(66.095,68.855) 66.375,68.575 DD1.2
  Bottom Layer w0.3: L8.1 v1(66.095,68.855)
NetDD1_21: DD1.21 R3.1 | length 64.7
  Top Layer w0.3: DD1.21 76.875,58.181 80.303,54.753 v1(80.303,53.103)
  Bottom Layer w0.3: R3.1 33.9,48.7 38,52.8 57.2,52.8 60.3,49.7 76.9,49.7 v1(80.303,53.103)
NetDD1_22: DD1.22 R10.1 | length 50.6
  Top Layer w0.3: DD1.22 77.675,58.3 v1(82.1,53.875)
  Bottom Layer w0.3: R10.1 45.25,50.25 47.15,52.15 56.931,52.15 60.031,49.05 77.169,49.05 80.222,52.103 80.717,52.103 81.303,52.689 81.303,53.078 v1(82.1,53.875)
NetDD1_30: DD1.30 SA5.2 | length 46.1
  Top Layer w0.3: DD1.30 80.525,66.975 87.75,59.75 87.75,39.5 83.5,35.25 v2(81.5,35.25)
  Bottom Layer w0.3: SA5.2@79.932,40.964 81.5,39.396 v2(81.5,35.25)
NetDD1_31: DD1.31 SA4.2 | length 57.6
  Top Layer w0.3: v2(79.25,34.75) 79.75,34.25 83.75,34.25 88.75,39.25 88.75,60.25 81.225,67.775 DD1.31
  Bottom Layer w0.3: SA4.2@71.497,40.964 71.497,40.278 72.5,39.275 77.3,39.275 79.25,37.325 v2(79.25,34.75)
NetDD1_32: DD1.32 SA3.2 | length 70.4
  Top Layer w0.3: v3(77,33.25) 84.5,33.25 89.75,38.5 89.75,60.75 81.925,68.575 DD1.32
  Bottom Layer w0.3: SA3.2@63.062,40.964 63.062,40.238 65.75,37.55 75.975,37.55 77.025,36.5 77,36.475 v3(77,33.25)
NetDD1_33: DD1.33 SA2.2 | length 51.3
  Top Layer w0.3: SA2.2@57.5,105.1 57.5,96.9 62.1,96.9 82.5,76.5 82.5,70.6 81.275,69.375 DD1.33
NetFU1_1: FU1.1 XS3.1 | length 8.3
  Bottom Layer w2: FU1.1 7.5,85.5 XS3.1
NetHG1_3: HG1.3 R14.2 | length 27.8
  Bottom Layer w0.254: R14.2 27.64,70.29 35.7,78.35 35.7,82.705 HG1.3
NetHL1_2: HL1.2 R1.2 | length 2.6
  Top Layer w0.3: HL1.2 13.9,7 R1.2
NetHL2_2: HL2.2 R4.2 | length 2.6
  Top Layer w0.3: R4.2 7.25,4.9 HL2.2
NetHL3_2: HL3.2 R5.2 | length 8.8
  Top Layer w0.2: HL3.2 v1(33.35,43.05)
  Bottom Layer w0.2: R5.2 29,43.05 v1(33.35,43.05)
NetHL4_2: HL4.2 R11.2 | length 8.4
  Top Layer w0.3: HL4.2 49.75,43.75 v1(49.75,43.1)
  Bottom Layer w0.3: R11.2 R11.2@45.25,43.547 ; v1(49.75,43.1) 49.675,43.175 45.775,43.175 R11.2@45.775,43.547 ; R11.2@45.25,43.547 R11.2@45.775,43.547 ; R11.2@45.25,43.547 R11.2@45.775,43.547
NetHL5_1: HL5.1 R13.1 | length 2.3
  Bottom Layer w0.2: HL5.1 2.1,60.1 R13.1
NetK1_2: K1.2 R5.1 VD1.A VT1.3 | length 20.5
  Bottom Layer w0.3: K1.2 31.075,35.5 VD1.A 28.5,42.7 27.443,42.7 26.268,43.875 R5.1 R5.1@25.875,43.75 ; R5.1@25.875,43.75 VT1.3 R5.1@25.875,43.75
NetK2_2: K2.2 R11.1 VD2.A VT4.3 | length 20.5
  Bottom Layer w0.3: K2.2 49.725,38.725 VD2.A 45.925,42.525 44.518,42.525 43.343,43.7 R11.1 R11.1@42.95,43.8 ; R11.1@42.95,43.8 VT4.3 R11.1@42.95,43.8
NetL2_1: L2.1 R8.1 XT3.1 | length 11.3
  Bottom Layer w0.3: XT3.1 57.895,10.395 L2.1 R8.1
NetR1_1: R1.1 VT2.3 | length 16.6
  Top Layer w0.3: VT2.3 9.161,18.6 10.249,17.512 10.249,10.098 11.75,8.597 R1.1
NetR2_1: R2.1 R3.2 VT1.1 | length 11.4
  Bottom Layer w0.3: R2.1 R2.1@21.275,48.35 ; VT1.1 21.55,47.23 R2.1@21.55,48.35 ; R3.2 25.507,48.7 24.307,49.9 22.843,49.9 ; R2.1@21.275,48.35 R2.1@21.293,48.35 ; R2.1@21.275,48.35 R2.1@21.293,48.35 ; R2.1@21.293,48.35 22.843,49.9 ; R2.1@21.293,48.35 22.843,49.9 ; R2.1@21.293,48.35 21.275,48.332 21.3,48.334 R2.1@21.55,48.35 ; R2.1@21.293,48.35 R2.1@21.55,48.35
NetR4_1: R4.1 VT3.3 | length 11.2
  Top Layer w0.3: VT3.3 8.398,14.6 9.55,13.448 R4.1
NetR6_2: R6.2 XS1.D- | length 13.3
  Bottom Layer w0.3: R6.2 31.7,98.3 33.25,96.75 38.055,96.75 38.405,96.4 40.95,96.4 XS1.D-
NetR7_2: R7.2 XS1.D+ | length 13.1
  Bottom Layer w0.3: R7.2 31.85,100.35 32,100.5 33.25,100.5 34.3,101.55 40.95,101.55 XS1.D+
NetR9_1: R9.1 R10.2 VT4.1 | length 8.5
  Bottom Layer w0.2: VT4.1@38.45,46 R9.1
  Bottom Layer w0.3: R9.1 39.575,49.625 41.825,49.625 R10.2 ; VT4.1 VT4.1@38.65,46 ; VT4.1@38.65,46 38.45,46 VT4.1@38.65,46
PRESSURE_OUT: DA1.1 DA1.2 DD1.26 | length 38.2
  Top Layer w0.3: DD1.26 82.025,63.775 86.75,59.05 86.75,40.375 v1(85.05,38.675)
  Bottom Layer w0.3: v1(85.05,38.675) 85.125,38.6 DA1.1 DA1.2
RESET: DD1.13 SA1.1 XS2.5 | length 110.9
  Top Layer w0.3: v2(10,20.5) SA1.1@11,19.5 ; SA1.1@11.25,11.1 11.25,19.3 SA1.1@11.25,19.5 ; DD1.13 70.3,59.6 70.3,59.066 69.834,58.6 66.325,58.6 65.025,59.9 33.8,59.9 23.5,49.6 20.2,49.6 8.5,37.9 8.5,33.75 10.275,33.75 14.25,29.775 14.25,21.734 12.016,19.5 ; SA1.1@11,19.5 SA1.1@11.25,19.5 ; SA1.1@11,19.5 SA1.1@11.25,19.5 ; SA1.1@11.25,19.5 12.016,19.5 ; SA1.1@11.25,19.5 12.016,19.5
  Bottom Layer w0.3: v2(10,20.5) 10,22.42 XS2.5
SCK: DD1.9 XS2.3 | length 101
  Top Layer w0.3: v2(8.25,19.75) 5.75,19.75 3,22.5 3,36.7 18.36,52.06 19.602,52.06 19.652,52.01 21.71,52.01 32.675,62.975 DD1.9 ; XS2.3@8.84,23.704 XS2.3
  Bottom Layer w0.3: v2(8.25,19.75) 8.84,20.34 XS2.3
THERMOUT: DD1.25 R8.2 XT3.2 | length 72.4
  Top Layer w0.3: v1(65.775,21.7) 65.775,26.775 76,37 81.5,37 85.5,41 85.5,58.975 81.5,62.975 DD1.25
  Bottom Layer w0.3: XT3.2 62.25,9.75 R8.2 62.25,18.175 v1(65.775,21.7)
USB_N: DD1.3 R6.1 | length 80.3
  Top Layer w0.3: v2(24.25,98.675) 21.175,98.675 20.475,97.975 20.475,93.725 24.651,89.549 24.651,72.448 27.421,69.678 62.249,69.678 64.225,67.701 65.799,67.701 65.825,67.675 67.079,67.675 67.18,67.775 DD1.3
  Bottom Layer w0.3: v2(24.25,98.675) 26.525,98.675 26.9,98.3 R6.1
USB_P: DD1.4 R7.1 | length 82.7
  Top Layer w0.3: v2(24.25,99.975) 21.426,99.975 20.051,98.599 19.875,98.424 19.875,92.875 23.875,88.875 23.875,72.375 27.172,69.078 62,69.078 63.976,67.101 65.799,67.101 65.825,67.127 66.988,67.127 67.141,66.975 DD1.4
  Bottom Layer w0.3: v2(24.25,99.975) 26.525,99.975 26.9,100.35 R7.1
V_BUS: DD1.7 XS1.VCC | length 140.8
  Top Layer w0.3: DD1.7 66.093,64.575 65.593,64.075 18.572,64.075 16.954,65.693 16.954,105.371 18.072,106.488 ; 18.072,106.488 28,106.488 18.072,106.488
  Bottom Layer w0.3: v2(28,106.5) 40.75,106.5 44.75,102.5 44.75,99 41.05,99 XS1.VCC
pads on no net: BP1.0 BP1.4 BP1.5 BP1.6 DA1.5 DA1.6 DA1.7 DA2.1 DA2.2 DA2.7 DA2.8 DA2.9 DA2.11 DA2.13 DA2.14 DD1.1 DD1.8 DD1.12 DD1.18 DD1.19 DD1.20 DD1.27 DD1.28 DD1.29 HG1.0 HG1.7 HG1.8 HG1.9 HG1.10 HG1.15 HG1.16 XS3.3

## Polygon pours and split planes (outlines as drawn)
GND on Bottom Layer "bottom_GND" (solid, remove dead copper, pour order 6): 110,0 0,0 0,107.95 110,107.95
GND on Top Layer "top_GND" (solid, remove dead copper, pour order 4): 110,107.95 0,107.95 0,0 110,0

## Other copper
Top Layer:
  pour cut-out: 73.35,96 73.35,102.9 102.75,102.9 102.75,96
  pour cut-out: 23.725,38.85 20.425,35.55 19.025,35.55 19.025,25.85 17.75,24.575 17.827,24.498 17.827,6.748 19.725,4.85 45.25,4.85 45.25,4.925 46.575,6.25 46.575,12.85 46.925,12.85 52.725,18.65 52.725,27 46.725,33 46.725,38.637
  text "Made in LoTP, RSVPU" at 74.5,100.25 h3
  text "α-SUN REV.1    2015" at 74.521,97.25 h3
Bottom Layer:
  pour cut-out: 47.75,38.75 47.75,32.5 52.725,26.927 52.725,11.6 46.275,5.15 18.025,5.15 18.025,5.7 17.8,5.925 17.75,30.75 23.25,31 23.25,38.75

## Silkscreen, mask and mechanical layers (free items; w line width, h text height)
Top Solder:
  rectangle: 73.25,96 102.75,103